# Altium PCB PCB1.pcbdoc (part 2 of 3)
Units mil, origin at the board's own origin, x right, y up, seen from the top; angles counter-clockwise.
Board outline 3947.03 x 3946.03 mil, 2 copper layers (Top Layer, Bottom Layer); 96 components, 119 nets, 489 pads, 175 vias.
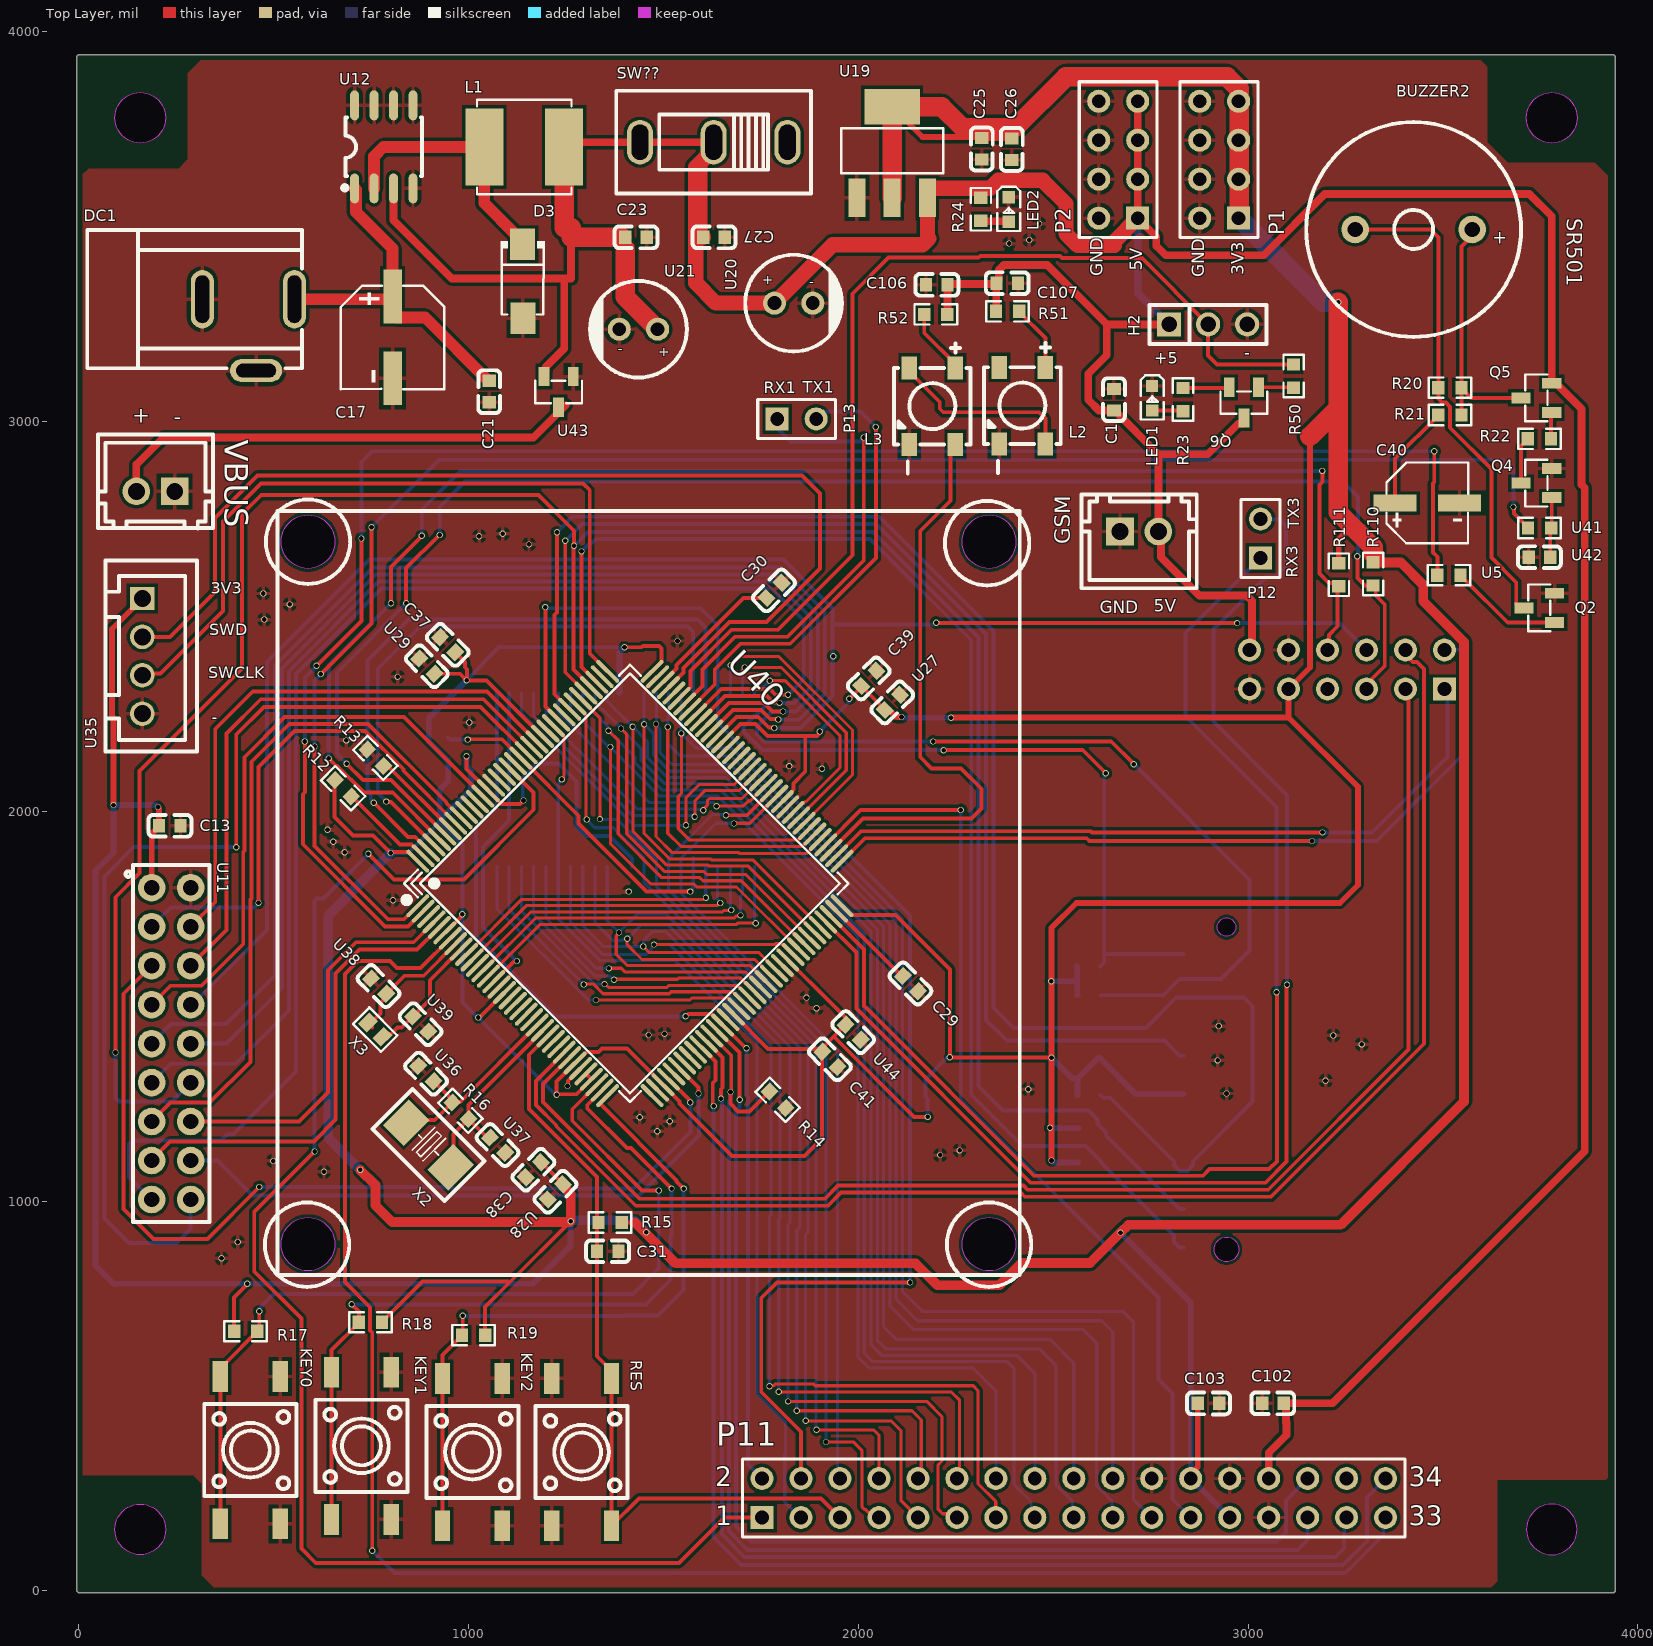
[diagram p0: Top Layer view]

## Via types
v1: diameter 16, hole 12, Top Layer to Bottom Layer, 175 vias

## Nets (pads, with @x,y where several pads share a name; then routed paths per layer and width w, separated by ;. In a path a pad name is that pad's centre, name@x,y a point inside that pad or via, vN(x,y) a via of type N, cw(c..) or ccw(c..) an arc to the next point about the centre after c; other vN are vias at no path point) (continued)
+5V: (continued)
  Top Layer w20: U12.3@807.53,3598.37 807.53,3516.47 957,3367 1245.48,3367 ; U43.2@1198,3129.17 1198,3140 1245.48,3187.48 1245.48,3367 ; L1.2@1245.48,3704.65 1257.83,3717 SW??.3@1440.03,3717 SW??.2@1629,3717 1629,3699 1629,3693.38 1603,3667.38 1603,3492 ; 1263,3497 1263,3367 1245.48,3367 ; C23.2@1393,3473 C23.2@1401.88,3464.12 ; 1401.88,3436.12 C23.2@1401.88,3464.12 ; 1415.88,3306.34 1415.88,3450.12 C23.2@1401.88,3464.12 ; C27.2@1601.42,3472.42 C27.2@1602,3473 ; R52.2@2228.66,3275 2228.83,3275.17 2228.83,3350.83 C106.1@2229,3351 2231,3353 2352.88,3353 C107.1@2354.11,3354.23 ; 2295,3599 2295,3592.95 2313.41,3574.53 R24.2@2314.55,3574.53 ; R51.2@2353.34,3283 2354.11,3283.77 C107.1@2354.11,3354.23 ; P2.7@2717,3822 P2.5@2717,3722 P2.3@2717,3622 P2.1@2717,3522 2764.81,3474.19 2764.81,3450.9 2788.72,3427 3040,3427 3197,3584 3722,3584 3779.3,3526.7 Q5.2@3779.3,3098.27 3790.12,3098.27 3856,3032.4 3856,2838 3864,2830 3864,1128 3217,481 C102.2@3091.56,481 3097.31,475.25 3097.31,433.28 3099,431.59 3099,400 3053,354 P11.28@3053,288 ; H2.1@2797.68,3249.43 2637.57,3249.43 ; Q6.3@2989.59,3009.3 2989.59,2998.48 2985.81,2994.7 2974.99,2994.7 2896.7,2916.41 2770,2916.41 ; P100.12@3004,2414 3010.1,2420.1 3010.1,2539.9 2996,2554 2875,2554 2776.43,2652.57 2776.43,2711.57 GSM.2@2770,2718 2770,2916.41 ; C107.1@2354.11,3354.23 C107.1@2354.88,3355 2360.63,3360.75 2360.63,3388.91 2373.72,3402 2485,3402 2637.57,3249.43 ; 2637.57,3249.43 2637.57,3170.57 2590,3123 2590,3056 2617.56,3028.44 C1.2@2656,3028.44 2657.97,3028.44 2770,2916.41
  Top Layer w39.37: C27.2@1602,3473 1583,3492 ; SW??.2@1629,3699 1583,3653 1583,3492 ; P2.1@2717,3522 2657.64,3462.64 2657.64,3452 2563,3452 2533,3482 2533,3559 2473.09,3618.91 2358.65,3618.91 2338.74,3599 2295,3599 2179.52,3599 2177.55,3597.03 U19.3@2177.55,3574.07 2177.55,3473.45 2181,3470 2164.61,3453.61 1934.39,3453.61 U20.1@1784.79,3304 1784.29,3304.5 1634,3304.5 1583,3355.5 1583,3492
  Top Layer w50: L1.2@1245.48,3704.65 1245.48,3497 1263,3497 ; 1263,3473 C23.2@1393,3473 ; 1401.88,3436.12 1401.88,3320.34 U21.1@1485.21,3237
  Bottom Layer w20: P2.1@2717,3522 2717,3330.11 H2.1@2797.68,3249.43
B_SWITCH: U40.1 U41.2 | length 4413
  Top Layer w10: v1(605,2166.39) 605,1911 793,1723 834.82,1723 U40.1@869.75,1757.93 ; v1(620.97,2352.19) 751,2482.22 v1(751,2729) ; v1(3681,2781) 3682.15,2779.85 3682.15,2764.32 3718.34,2728.13 U41.2@3718.34,2727
  Bottom Layer w10: v1(605,2166.39) 605,2335.63 620.97,2351.6 v1(620.97,2352.19) ; v1(751,2729) 924,2902 3656,2902 3681,2877 v1(3681,2781)
B_WPS: U5.2 U40.2 | length 4544.1
  Top Layer w10: v1(580,2179) 580,2048.96 575,2043.96 575,1915.54 785.54,1705 844.66,1705 U40.2@883.67,1744.01 ; v1(609.65,2373.35) 725,2488.7 v1(725,2700) ; v1(3478,2924) 3478,2844.81 3474.56,2841.36 3474.56,2664.57 3485.96,2653.18 U5.2@3485.96,2605.87
  Bottom Layer w10: v1(580,2179) 580,2343.7 v1(609.65,2373.35) ; v1(725,2700) 725,2897 752,2924 v1(3478,2924)
DCMI_D0: P100.6 U11.8 U40.96 | length 4565.2
  Top Layer w10: U40.96@1638.1,2192.22 1687.88,2242 1743.35,2242 1770.4,2214.95 1783.13,2214.95 v1(1784.28,2213.8) ; v1@2200,2483 v1(2972,2483)
  Bottom Layer w10: U11.8@283,1496 483,1696 483,2382.74 746.26,2646 1808.28,2646 1934,2520.28 1934,2479 ; v1(1784.28,2213.8) 1852.26,2213.8 1934,2295.54 v1@1934,2400 ; v1(1936,2398) v1@1934,2400 ; v1(2200,2484) 2195,2479 1934,2479 ; v1(2972,2483) 3235,2483 3290,2428 P100.6@3303,2428 ; v1@1934,2400 1934,2479